# EAGLE board robot (EAGLE 4.16)
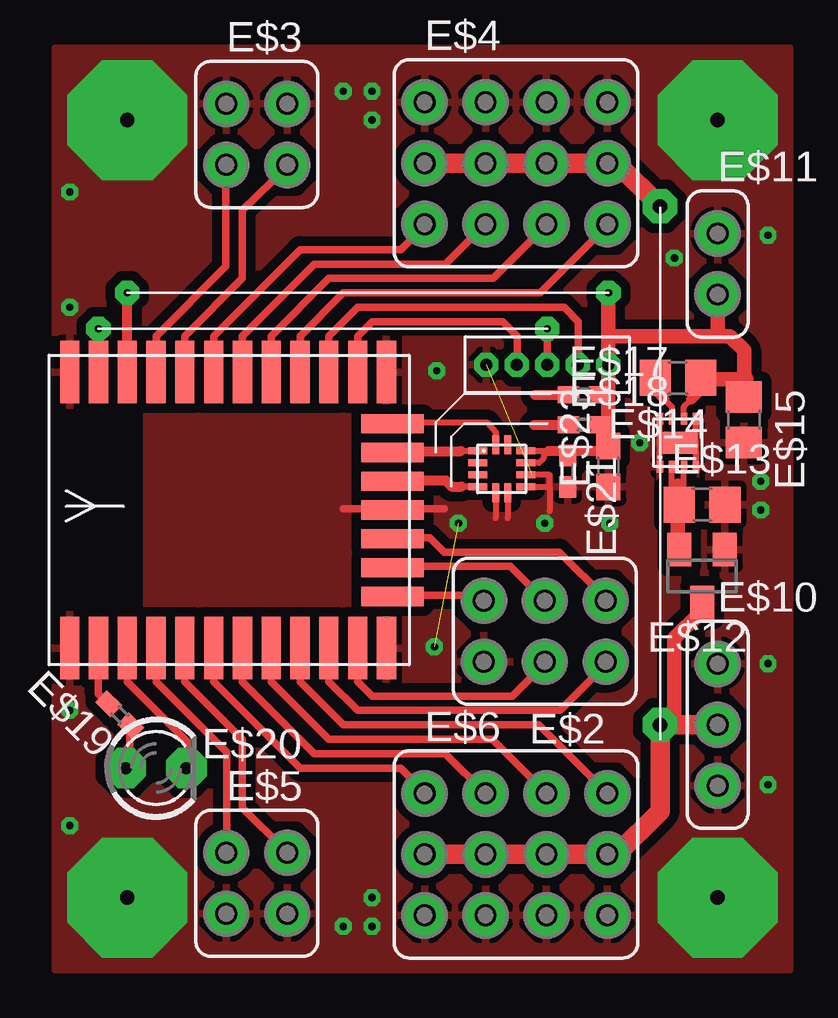
[diagram p0: board, top side]

No outline drawn. Coordinates in mm, seen from the top.
Copper layers (1*16): Top 0.035mm / dielectric 1.5mm / Bottom 0.035mm
Design rules "default": minimum track width 10mil, minimum drill 24mil, track to track 8mil, track to pad 8mil, pad to pad 8mil, via to via 8mil, smd to smd 8mil, copper to edge 40mil, drill to drill 8mil, minimum pad ring 10mil, minimum via ring 8mil, stop-mask expansion 4mil, vias tented up to drill 0mil, thermal gap 10mil

## Footprints (pad centres in the part's own frame; a part is rotated, then mirrored left to right if it is on the bottom)
BGM13P = smd 2.6 x 0.8: 1 0.7,14.15; 2 0.7,12.95; 3 0.7,11.75; 4 0.7,10.55; 5 0.7,9.35; 6 0.7,8.15; 7 0.7,6.95; 8 0.7,5.75; 9 0.7,4.55; 10 0.7,3.35; 11 0.7,2.15; 12 0.7,0.95; 20 12.2,0.95; 21 12.2,2.15; 22 12.2,3.35; 23 12.2,4.55; 24 12.2,5.75; 25 12.2,6.95; 26 12.2,8.15; 27 12.2,9.35; 28 12.2,10.55; 29 12.2,11.75; 30 12.2,12.95; 31 12.2,14.15 | smd 0.8 x 2.6: 13 2.85,0.7; 14 4.05,0.7; 15 5.25,0.7; 16 6.45,0.7; 17 7.65,0.7; 18 8.85,0.7; 19 10.05,0.7
FE03-2 = drill 0.914 pad 1.778 round: 1 -2.54,1.27 | drill 0.914 pad 1.778 octagon: 2 -2.54,-1.27; 3 0,1.27; 4 0,-1.27; 5 2.54,1.27; 6 2.54,-1.27
FE02-2 = drill 0.914 pad 1.778 round: 1 -1.27,1.27 | drill 0.914 pad 1.778 octagon: 2 -1.27,-1.27; 3 1.27,1.27; 4 1.27,-1.27
FE04-3 = drill 0.914 pad 1.778 round: 1 -3.81,0; 9 -3.81,2.54 | drill 0.914 pad 1.778 octagon: 2 -3.81,-2.54; 3 -1.27,0; 4 -1.27,-2.54; 5 1.27,0; 6 1.27,-2.54; 7 3.81,0; 8 3.81,-2.54; 10 -1.27,2.54; 11 1.27,2.54; 12 3.81,2.54
HEADER5SH = drill 0.5 octagon: P$1 -2.54,0; P$2 -1.27,0; P$3 0,0; P$4 2.54,0; P$5 1.27,0
LGA12 = smd 0.8 x 0.3: 1 -0.75,0.5; 2 -0.75,0; 3 -0.75,-0.5; 4 -0.75,-1; 7 1.25,-1; 8 1.25,-0.5; 9 1.25,0; 10 1.25,0.5 | smd 0.3 x 0.8: 5 0,-1.25; 6 0.5,-1.25; 11 0.5,0.75; 12 0,0.75
WSON8 = smd 0.28 x 0.5: 1 -1,-1; 2 -0.5,-1; 3 0,-1; 4 0.5,-1; 5 0.5,1; 6 0,1; 7 -0.5,1; 8 -1,1 | smd 1.6 x 0.9: EP -0.25,0
FE03 = drill 0.914 pad 1.778 round: 2 0,2.54 | drill 0.914 pad 1.778 octagon: 4 0,0; 6 0,-2.54
FE02 = drill 0.914 pad 1.778 round: 1 0,1.27 | drill 0.914 pad 1.778 octagon: 2 0,-1.27
SOT23 = smd 1 x 1.4: 1 -0.95,-1.1; 2 0.95,-1.1; 3 0,1.1
C0805 = smd 1.3 x 1.5: 1 -0.95,0; 2 0.95,0
C0402 = smd 0.9 x 0.7: 1 -0.65,0; 2 0.65,0
LED3MM = drill 0.5 pad 1.676 octagon: A -1.27,0; K 1.27,0
C0603 = smd 1.1 x 1: 1 -0.85,0; 2 0.85,0

## Placement (x,y rotation side)
E$1  [BGM13P]  14.75,12.7 90 top
E$2  [FE03-2]  20.4,14.1 180 top
E$3  [FE02-2]  8.4,34.8 0 top
E$4  [FE04-3]  19.2,33.6 0 top
E$5  [FE02-2]  8.4,3.6 0 top
E$6  [FE04-3]  19.2,4.8 0 top
E$7  [HEADER5SH]  20.5,25.2 0 top
E$8  [LGA12]  18.35,21.11 0 top
E$9  [WSON8]  26.2,21.95 0 top
E$10  [FE03]  27.6,10.2 0 top
E$11  [FE02]  27.6,29.4 0 top
E$12  [SOT23]  26.95,16.4 180 top
E$13  [C0805]  26.96,19.38 0 top
E$14  [C0805]  25.95,24.65 180 top
E$15  [C0805]  28.7,22.91 270 top
E$17  [C0402]  22.04,23.95 0 top
E$18  [C0402]  22.04,22.7 0 top
E$19  [C0402]  2.69,10.62 135 top
E$20  [LED3MM]  4.2,8.4 0 top
E$21  [C0402]  21.35,20.77 270 top
E$23  [C0603]  23.05,20.96 90 top

## Library data of the parts
E$1 = silabs
E$2-E$6 E$10 E$11 = con-lsta
E$7 = sb
E$8 = st-microelectronics
E$9 = texas
E$12 = transistor-fet
E$13-E$15 E$17-E$19 E$21 E$23 = ref-packages
E$20 = led

## Nets
GND: E$1.1 E$1.12 E$1.20 E$1.31 E$2.5 E$3.1 E$3.3 E$4.9 E$4.10 E$4.11 E$4.12 E$5.2 E$5.4 E$6.2 E$6.4 E$6.6 E$6.8 E$7.P$1 E$9.1 E$9.4 E$9.5 E$9.8 E$9.EP E$10.2 E$10.6 E$11.1 E$12.1 E$13.2 E$15.2 E$21.2 E$23.1
S$24: E$9.7
S$28: E$9.6
S$29: E$9.2
S$30: E$9.3

## Tracks (layer width: path | path; a pad name or v marks a point on that pad's centre or on a via)
GND  (via drill 0.3 pad 0.41, 0.6 pad 5)  (2 unrouted)
  Top 0.254: 18.35,19.61 18.35,18.82 | 18.85,19.61 18.85,18.82 | 19.85,20.11 20.6,20.11 | 20.6,20.11 20.6,19.11 | 20.6,20.11 20.6,20.61 19.85,20.61 | E$9.1 25.2,21.95 | 25.2,21.95 E$9.8 | 25.2,21.95 26.7,21.95 | 26.7,21.95 E$9.4 | 26.7,21.95 E$9.5
  Top 0.305: 12,19.2 16.2,19.2
  other vias: 3,35.4 27.6,35.4 3,3 27.6,3 25.8,29.65 29.4,20.35 23.1,18.6 20.4,18.6 29.7,7.7 13.2,1.8 12,1.8 0.6,10.8 13.2,3 15.9,24.95 15.8,13.45 0.6,27.6 12,36.6 13.2,36.6 13.2,35.4 29.7,30.6 29.7,12.75 0.6,32.4 0.6,6 16.8,18.6 24.35,21.95 29.4,19.15
  pour Top (isolate 0.406): 0,0 0,38.4 30.6,38.4 30.6,0
PWR
  Top 0.61: 25.94,17.65 25.94,20.16
S$1
  Top 0.305: 12.6,25.2 12.6,26.4 13.2,27 18.65,27 19.25,26.4 19.25,25.15
S$2
  Top 0.305: 11.4,25.2 11.4,26.4 12.6,27.6 21.2,27.6 21.8,27 21.8,25.2
S$3  (via drill 0.3 pad 1.02)
  Top 0.305: 1.8,25.2 v1.8,26.7
S$4  (via drill 0.3 pad 1.02)
  Top 0.305: 20.5,25.15 v20.5,26.7
S$5
  Top 0.406: 3,25.8 3,28.2
S$6
  Top 0.305: 4.2,25.8 4.2,26.4 7.1,29.3 7.1,33.5
S$7  (via drill 0.3 pad 1.02)
  Top 0.61: 23.05,23.3 v23.05,28.2
S$8
  Top 0.305: 5.4,25.2 5.4,26.4 7.8,28.8 7.8,31.65 9.7,33.5
S$9
  Top 0.61: 23.05,22.3 23.05,23.45
S$10  (via drill 0.3 pad 1.02)
  other vias: 3,28.2
S$11
  Top 0.61: 27.6,26.4 27.6,28.2
S$12
  Top 0.305: 10.2,25.2 10.2,26.4 12,28.2 20.2,28.2 23,31
S$13
  Top 0.305: 9,25.2 9,26.4 11.4,28.8 18.25,28.8 20.55,31.1
S$14
  Top 0.305: 7.8,25.2 7.8,26.4 10.8,29.4 16.25,29.4 18,31.15
S$15
  Top 0.305: 6.6,25.2 6.6,26.4 10.2,30 14.4,30 15.35,30.95 15.35,31.05
S$16
  Top 0.305: 10.2,12.6 10.2,12 12,10.2 20.15,10.2 23.15,7.2
S$17
  Top 0.305: 9,12.6 9,12 11.4,9.6 18.2,9.6 20.45,7.35
S$18
  Top 0.305: 7.8,13.2 7.8,12 10.8,9 16.25,9 17.95,7.3
S$19
  Top 0.305: 6.6,13.2 6.6,12 10.2,8.4 14.4,8.4 15.45,7.35
S$20
  Top 0.305: 5.4,12.6 5.4,12 7.8,9.6 7.8,6.75 9.6,4.95
S$21
  Top 0.305: 4.2,12.6 4.2,12 7.15,9.05 7.15,4.85
S$22
  Top 0.305: 11.4,12.6 11.4,12 12.6,10.8 21.05,10.8 23.05,12.8
S$23
  Top 0.305: 12.6,12.6 12.6,12 13.2,11.4 19.05,11.4 20.45,12.8
S$24
  Top 0.254: E$9.7 25.7,23.44 25.4,23.74
  Top 0.406: 25.4,23.74 25.04,24.1 25.04,24.95
S$25
  Top 0.305: 15,18 15.6,18 16.2,17.4 21,17.4 22.95,15.45
S$26
  Top 0.305: 15,16.8 18.95,16.8 20.45,15.3
S$27
  Top 0.305: 15,15.6 18,15.6
S$28
  Top 0.254: E$9.6 26.2,23.44 26.5,23.74
  Top 0.406: 26.5,23.74 26.86,24.1 26.86,24.45
S$29
  Top 0.254: 25.7,19.7 E$9.2
S$30
  Top 0.254: 26.2,19.71 E$9.3
S$31  (1 unrouted)
  Top 0.61: 26.79,24.6 28.69,24.6
  Top 0.813: 28.69,24.6 28.69,23.81
S$32
  Top 0.61: 23.05,26.4 28.1,26.4 28.7,25.8 28.7,24
S$33
  Top 0.254: 17.4,20.11 17.05,20.11
S$34
  Top 0.305: 3,12.6 3,12 5.5,9.5 5.5,8.4
S$35
  Top 0.305: 2.4,10.9 1.8,11.5 1.8,12.6
S$36
  Top 0.406: 20,23.95 21,23.95
S$37  (via drill 0.6 pad 1.42)
  Top 0.61: 25.8,10.2 25.8,13.8 26.9,14.9
  Top 0.813: 15.6,4.8 23.4,4.8 25.2,6.6 v25.2,10.2 25.8,10.2 27.6,10.2 | 26.9,14.9 26.9,15.05
S$38  (via drill 0.6 pad 1.42)
  Top 0.813: 15,33.6 23.4,33.6 v25.2,31.8
S$39
  Top 0.406: 19.95,22.7 21,22.7
S$40
  Top 0.305: 3.1,8.4 3.1,10.25
S$74
  Top 0.406: 14.98,20.38 16.27,20.38 16.52,20.13 16.92,20.13
S$79
  Top 0.406: 15.2,21.6 16.9,21.6
S$80
  Top 0.254: 18.35,21.85 18.35,22.4 18,22.8 14.8,22.8
S$83
  Top 0.254: 17.35,21.6 16.6,21.6
S$85
  Top 0.254: 19.35,21.11 20.15,21.11 20.35,21.32 20.35,21.61 | 19.85,21.61 20.35,21.61 | 20.35,21.61 20.55,21.61
  Top 0.406: 20.55,21.61 22.9,21.61